# Altium PCB Teensy36AdapterBoard.PcbDoc
Units mm, origin at the board's own origin, x right, y up, seen from the top; angles counter-clockwise.
Board outline 30 x 70.87 mm, 2 copper layers (Top Layer, Bottom Layer); 6 components, 31 nets, 122 pads, 0 vias.
Unrouted connection lines stored in the file: 1.
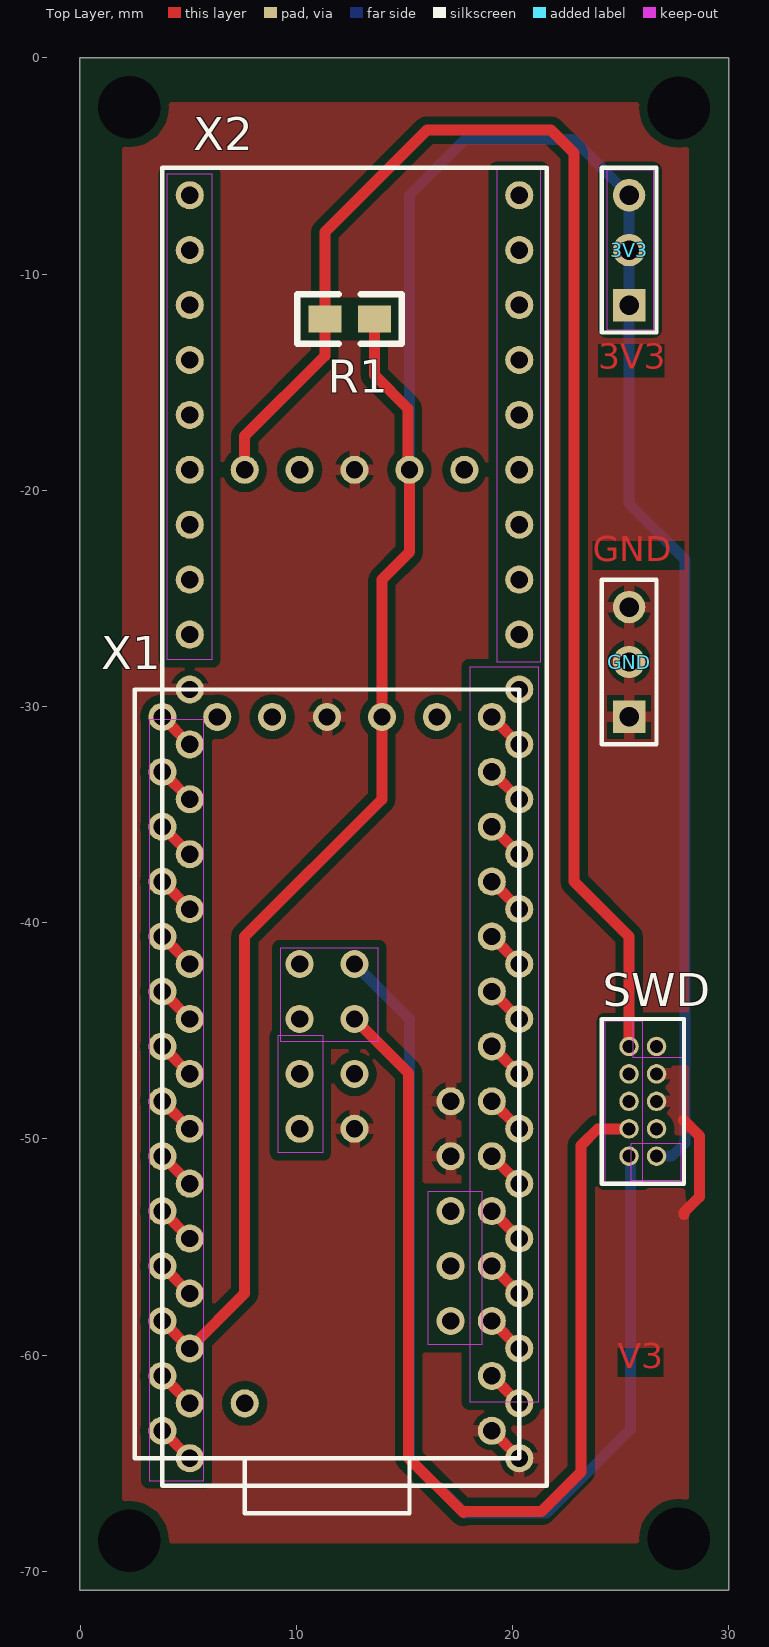
[diagram p0: Top Layer view]
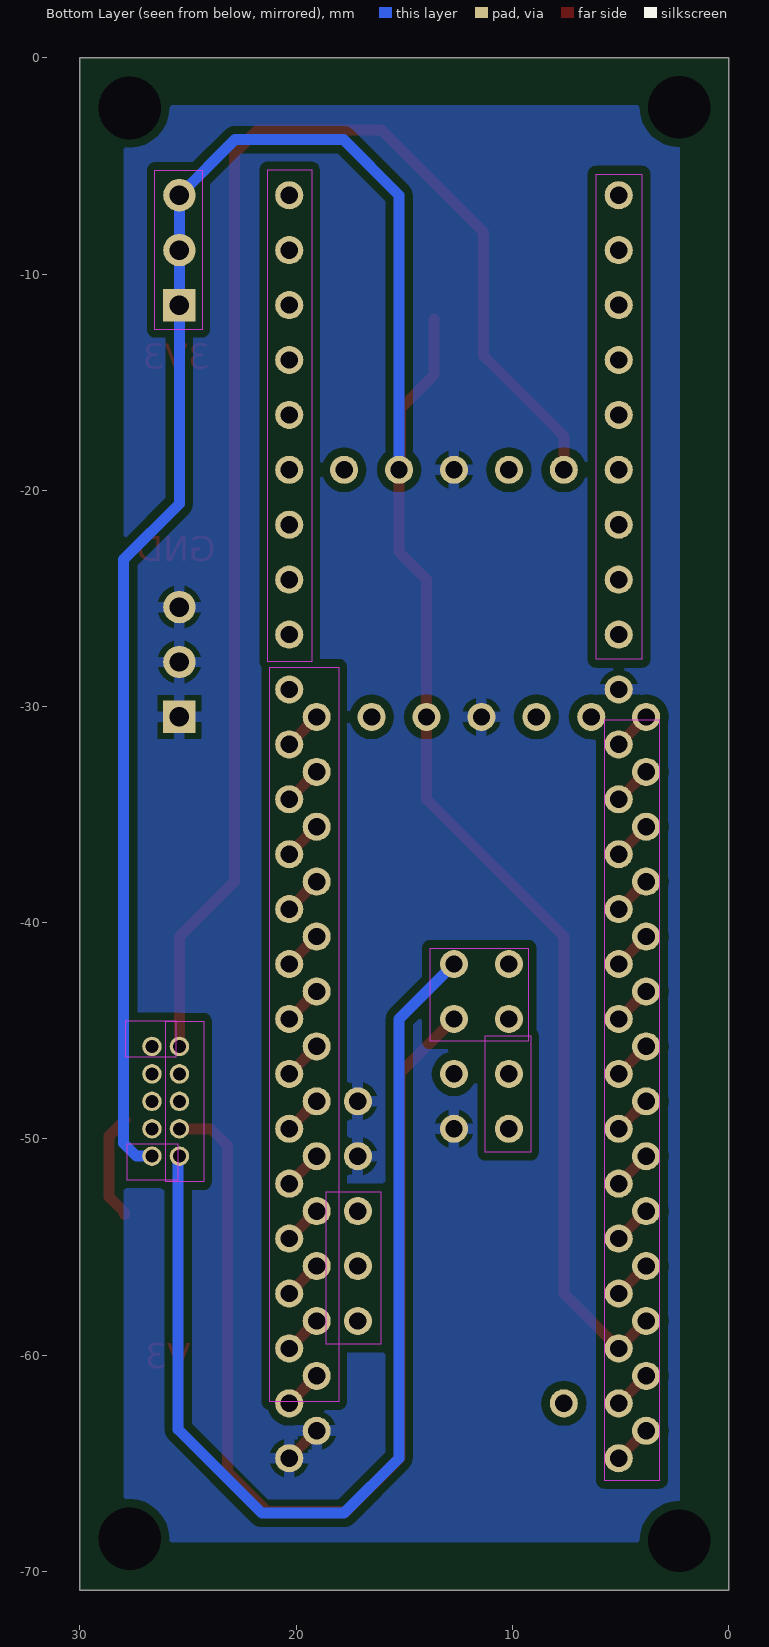
[diagram p1: Bottom Layer view, seen from below]

## Layer stack, top to bottom
Top Solder: solder mask 0.0102, Solder Resist, Dk 3.5
Top Layer: signal copper 0.0356
Dielectric1: dielectric 0.32, FR-4, Dk 4.8
Bottom Layer: signal copper 0.0356
Bottom Solder: solder mask 0.0102, Solder Resist, Dk 3.5

## Board outline
-0.005,-70.866 -0.005,0 29.995,0 29.995,-70.866

## Design rules (kind name [scope] priority, off if disabled: settings)
Clearance TextC [IsText] p1: gap=0
Clearance Clearance_1 [All] p2: gap=0.381
Clearance Clearance_Poly [InPoly] p3: gap=0.508
PolygonConnect PolygonConnect_Via [IsVia] p1: connectstyle=Direct reliefconductorwidth=0.254 reliefentries=4 polygonreliefangle="90 Angle" airgapwidth=0.254
PolygonConnect [All] p2: connectstyle=Relief reliefconductorwidth=0.508 reliefentries=4 polygonreliefangle="90 Angle" airgapwidth=0.254
RoomDefinition Teensy36AdapterBoard [InComponentClass('Teensy36AdapterBoard')] p1: confinementstyle=ConfineIn formatcopy=TRUE lockcomponents=FALSE outline 43.425,-73.25 -11.435,-73.25 -11.435,1.994 43.425,1.994
RoutingVias [All] p1: holewidth=0.508 width=1.016 viastyle="Through Hole" minholewidth=0.508 minwidth=1.016 maxholewidth=0.711 maxwidth=1.27
ShortCircuit Text [IsText] p1: allowed=TRUE
ShortCircuit [All] p2: allowed=FALSE
SolderMaskExpansion [All] p1: expansion=0.102
Width [All] p1: maxlimit=0.762 minlimit=0.508 preferedwidth=0.762 minimp=50.000000 maximp=50.000000 favimp=50.000000
29 further rules are at their usual default settings.

## Components (designator, comment, footprint, x,y, rotation, side; value= is the part's Value field where it differs from the comment)
3V3 "3V3" HDR1X3 25.395,-11.43 r90 top
GND "GND" HDR1X3 25.395,-30.48 r90 top
R1 "10kΩ" 0805 11.325,-12.075 r0 top
SWD "SWD_DebugInterface" "SWD DEBUG INTERFACE 50MIL" 25.395,-46.99 r90 top
X1 "Teensy 3.2" TEENSY_3_2 15.235,-54.61 r90 top
X2 "Teensy_3_6" TEENSY_3_6 5.075,-64.77 r90 top

## Footprints (in the part's own frame and the unit in brackets; to place one, negate y for a bottom-side part, rotate by r counter-clockwise, add the part's x,y. Pads: shape width x height; smd on the part's side, far side on the other; paste and mask are expansions set on the pad)
0805 [mil]
  rect 60x50 smd: 1(0,0) 2(90,0)
  silkscreen extent -50,-45 140,45
HDR1X3 [mm] "Connector; Header; 3 Position"
  rect 1.5x1.5 hole 0.9: 1(0,0)
  round 1.5 hole 0.9: 2(2.54,0) 3(5.08,0)
  silkscreen extent -1.27,-1.27 6.35,1.27
"SWD DEBUG INTERFACE 50MIL" [mm] "T821110A1R100CEU (Farnell)"
  round 0.9 hole 0.6: 1(-3.81,-1.27) 2(-3.81,0) 3(-2.54,-1.27) 4(-2.54,0) 5(-1.27,-1.27) 6(-1.27,0) 7(0,-1.27) 8(0,0) 9(1.27,-1.27) 10(1.27,0)
  silkscreen extent -5.08,-2.54 2.54,1.27
TEENSY_3_2 [mm]
  round 1.3 hole 0.8: 0(-6.35,-3.81) 1(-3.81,-3.81) 2(-1.27,-3.81) 3(1.27,-3.81) 3.3V_1(-3.81,11.43) 3.3V_2(24.13,1.27) 4(3.81,-3.81) 5(6.35,-3.81) 6(8.89,-3.81) 7(11.43,-3.81) 8(13.97,-3.81) 9(16.51,-3.81) 10(19.05,-3.81) 11(21.59,-3.81) 12(24.13,-3.81) 13(24.13,11.43) 14(21.59,11.43) 15(19.05,11.43) 16(16.51,11.43) 17(13.97,11.43) 18(11.43,11.43) 19(8.89,11.43) 20(6.35,11.43) 21(3.81,11.43) 22(1.27,11.43) 23(-1.27,11.43) A14(24.13,8.89) AGND(-6.35,11.43) GND_1(24.13,3.81) GND_2(-8.89,-3.81) Program(24.13,6.35) VBat(24.13,-1.27) Vin(-8.89,11.43)
  silkscreen extent -12.7,-5.08 25.4,12.7, body extent -12.7,-5.08 25.4,12.7, height 7
TEENSY_3_6 [mm]
  round 1.3 hole 0.8: 0(2.54,-15.24) 1(5.08,-15.24) 2(7.62,-15.24) 3(10.16,-15.24) 3.3V(35.56,-15.24) 3.3V_1(5.08,0) 3.3V_2(45.72,-10.16) 4(12.7,-15.24) 5(15.24,-15.24) 5V(6.35,-12.065) 6(17.78,-15.24) 7(20.32,-15.24) 8(22.86,-15.24) 9(25.4,-15.24) 10(27.94,-15.24) 11(30.48,-15.24) 12(33.02,-15.24) 13(33.02,0) 14(30.48,0) 15(27.94,0) 16(25.4,0) 17(22.86,0) 18(20.32,0) 19(17.78,0) 20(15.24,0) 21(12.7,0) 22(10.16,0) 23(7.62,0) 24(38.1,-15.24) 25(40.64,-15.24) 26(43.18,-15.24) 27(45.72,-15.24) 28(48.26,-15.24) 29(50.8,-15.24) 30(53.34,-15.24) 31(55.88,-15.24) 32(58.42,-15.24) 33(58.42,0) 34(55.88,0) 35(53.34,0) 36(50.8,0) 37(48.26,0) 38(45.72,0) 39(43.18,0) 54(22.86,-5.08) 55(20.32,-5.08) 56(17.78,-5.08) 57(15.24,-5.08) A21(40.64,0) A22(38.1,0) AGND(2.54,0) DC(20.32,-7.62) DD(22.86,-7.62) DE(17.78,-7.62) DM(8.89,-12.065) DP(11.43,-12.065) GND_1(45.72,-7.62) GND_2(0,-15.24) GND_3(35.56,0) GND_4(15.24,-7.62) GND_5(13.97,-12.065) GND_6(16.51,-12.065) Program(45.72,-5.08) RESET(45.72,-2.54) VBat(45.72,-12.7) Vin(0,0) VUSB(2.54,-2.54)
  silkscreen extent -1.27,-16.51 59.69,1.27, body extent -1.66,-16.51 59.69,1.27, height 7

## Part data
3V3 GND: library part "Header 3", "Header, 3-Pin"
R1: library part 2, "Widerstand 0603"
X1: library part Teensy_3_2

## Free pads (board coordinates)
  round 1.067 hole 2.9: 0(2.281,-68.58) 0(2.281,-2.286) 0(27.689,-68.489) 0(27.689,-2.311)

## Nets (pads, with @x,y where several pads share a name; then routed paths per layer and width w, separated by ;. In a path a pad name is that pad's centre, name@x,y a point inside that pad or via, vN(x,y) a via of type N, cw(c..) or ccw(c..) an arc to the next point about the centre after c; other vN are vias at no path point)
3.3V: 3V3.1 3V3.2 3V3.3 R1.2 SWD.1 X1.3.3V_1 X1.3.3V_2 X2.3.3V_1 X2.3.3V_2 | length 125.8
  Top Layer w0.508: X1.3.3V_1 X2.3.3V_1 7.615,-57.15 7.615,-40.64 13.965,-34.29 X1.3.3V_2 13.965,-24.13 15.235,-22.86 X2.3.3V_2 15.175,-18.99 15.175,-16.225 13.611,-14.661 R1.2
  Bottom Layer w0.508: X2.3.3V_2 15.235,-6.35 17.81,-3.775 22.82,-3.775 3V3.3 3V3.2 3V3.1 25.395,-20.62 27.975,-23.2 27.975,-50.2 27.375,-50.8 SWD.1
GND: GND.1 GND.2 GND.3 SWD.5 SWD.7 SWD.9 X1.GND_1 X1.GND_2 X2.GND_1 X2.GND_2 X2.GND_3 X2.GND_4 X2.GND_5 X2.GND_6 | length 6.8
  Top Layer w0.508: X1.GND_2 X2.GND_2 ; 27.905,-49.125 28.65,-49.87 28.65,-52.675 27.925,-53.4 27.925,-53.5
NetR1_1: R1.1 SWD.10 X2.RESET | length 68.8
  Top Layer w0.508: X2.RESET 7.615,-17.485 11.325,-13.775 R1.1 11.325,-8.05 16.042,-3.333 21.783,-3.333 22.855,-4.405 22.855,-38.1 25.395,-40.64 SWD.10
NetSWD_2: SWD.2 X2.DD | length 49.2
  Bottom Layer w0.508: X2.DD 15.235,-44.45 15.235,-64.77 17.775,-67.31 21.585,-67.31 25.45,-63.445 SWD.2@25.45,-51.045
NetSWD_4: SWD.4 X2.DC | length 48.8
  Top Layer w0.508: X2.DC 15.2,-46.955 15.2,-64.75 17.725,-67.275 17.775,-67.225 21.35,-67.225 23.175,-65.4 23.175,-50.3 23.945,-49.53 SWD.4
NetX1_0: X1.0 X2.0 | length 1.8
  Top Layer w0.508: X1.0 X2.0
NetX1_1: X1.1 X2.1 | length 1.8
  Top Layer w0.508: X1.1 X2.1
NetX1_2: X1.2 X2.2 | length 1.8
  Top Layer w0.508: X1.2 X2.2
NetX1_3: X1.3 X2.3 | length 1.8
  Top Layer w0.508: X1.3 X2.3
NetX1_4: X1.4 X2.4 | length 1.8
  Top Layer w0.508: X1.4 X2.4
NetX1_5: X1.5 X2.5 | length 1.8
  Top Layer w0.508: X1.5 X2.5
NetX1_6: X1.6 X2.6 | length 1.8
  Top Layer w0.508: X1.6 X2.6
NetX1_7: X1.7 X2.7 | length 1.8
  Top Layer w0.508: X1.7 X2.7
NetX1_8: X1.8 X2.8 | length 1.8
  Top Layer w0.508: X1.8 X2.8
NetX1_9: X1.9 X2.9 | length 1.8
  Top Layer w0.508: X1.9 X2.9
NetX1_10: X1.10 X2.10 | length 1.8
  Top Layer w0.508: X1.10 X2.10
NetX1_11: X1.11 X2.11 | length 1.8
  Top Layer w0.508: X1.11 X2.11
NetX1_12: X1.12 X2.12 | length 1.8
  Top Layer w0.508: X1.12 X2.12
NetX1_13: X1.13 X2.13 | length 1.8
  Top Layer w0.508: X1.13 X2.13
NetX1_14: X1.14 X2.14 | length 1.8
  Top Layer w0.508: X1.14 X2.14
NetX1_15: X1.15 X2.15 | length 1.8
  Top Layer w0.508: X1.15 X2.15
NetX1_16: X1.16 X2.16 | length 1.8
  Top Layer w0.508: X1.16 X2.16
NetX1_17: X1.17 X2.17 | length 1.8
  Top Layer w0.508: X1.17 X2.17
NetX1_18: X1.18 X2.18 | length 1.8
  Top Layer w0.508: X1.18 X2.18
NetX1_19: X1.19 X2.19 | length 1.8
  Top Layer w0.508: X1.19 X2.19
NetX1_20: X1.20 X2.20 | length 1.8
  Top Layer w0.508: X1.20 X2.20
NetX1_21: X1.21 X2.21 | length 1.8
  Top Layer w0.508: X1.21 X2.21
NetX1_22: X1.22 X2.22 | length 1.8
  Top Layer w0.508: X1.22 X2.22
NetX1_23: X1.23 X2.23 | length 1.8
  Top Layer w0.508: X1.23 X2.23
NetX1_AGND: X1.AGND X2.AGND | length 1.8
  Top Layer w0.508: X1.AGND X2.AGND
NetX1_Vin: X1.Vin X2.Vin | length 1.8
  Top Layer w0.508: X1.Vin X2.Vin
pads on no net: SWD.3 SWD.6 SWD.8 X1.A14 X1.Program X1.VBat X2.3.3V X2.5V X2.24 X2.25 X2.26 X2.27 X2.28 X2.29 X2.30 X2.31 X2.32 X2.33 X2.34 X2.35 X2.36 X2.37 X2.38 X2.39 X2.54 X2.55 X2.56 X2.57 X2.A21 X2.A22 X2.DE X2.DM X2.DP X2.Program X2.VBat X2.VUSB

## Polygon pours and split planes (outlines as drawn)
GND on Top Layer "GND_L01_P000" (solid, pour order 0): 1.95,-2.037 1.95,-68.713 28.16,-68.713 28.16,-2.037
GND on Bottom Layer "GND_L02_P002" (solid, pour order 2): 2.261,-2.185 27.975,-2.185 27.975,-68.665 2.261,-68.665

## Keep-outs
Multi-Layer:
  rectangle net GND: 24.275,-51.992 26.025,-44.55
  rectangle: 16.075,-59.5 18.6,-52.439
  rectangle: 9.15,-50.625 11.241,-45.225
  rectangle: 9.25,-45.475 13.8,-41.175
  rectangle: 24.35,-12.561 26.526,-5.2
  rectangle: 4,-27.816 6.125,-5.375
  rectangle: 19.275,-27.925 21.317,-5.175
  rectangle: 18.019,-62.15 21.225,-28.175
  rectangle: 3.2,-65.8 5.725,-30.6
  region: 27.8,-51.9 27.8,-50.225 25.481,-50.225 25.481,-51.9
  region: 27.875,-46.219 27.875,-44.525 25.556,-44.525 25.556,-46.219

## Other copper
Top Layer:
  text "V3" at 24.875,-61 h2

## Silkscreen, mask and mechanical layers (free items; w line width, h text height)
Mechanical 1:
  the board outline again, w0.2